# EAGLE board cpOD_array (EAGLE 7.7.0)
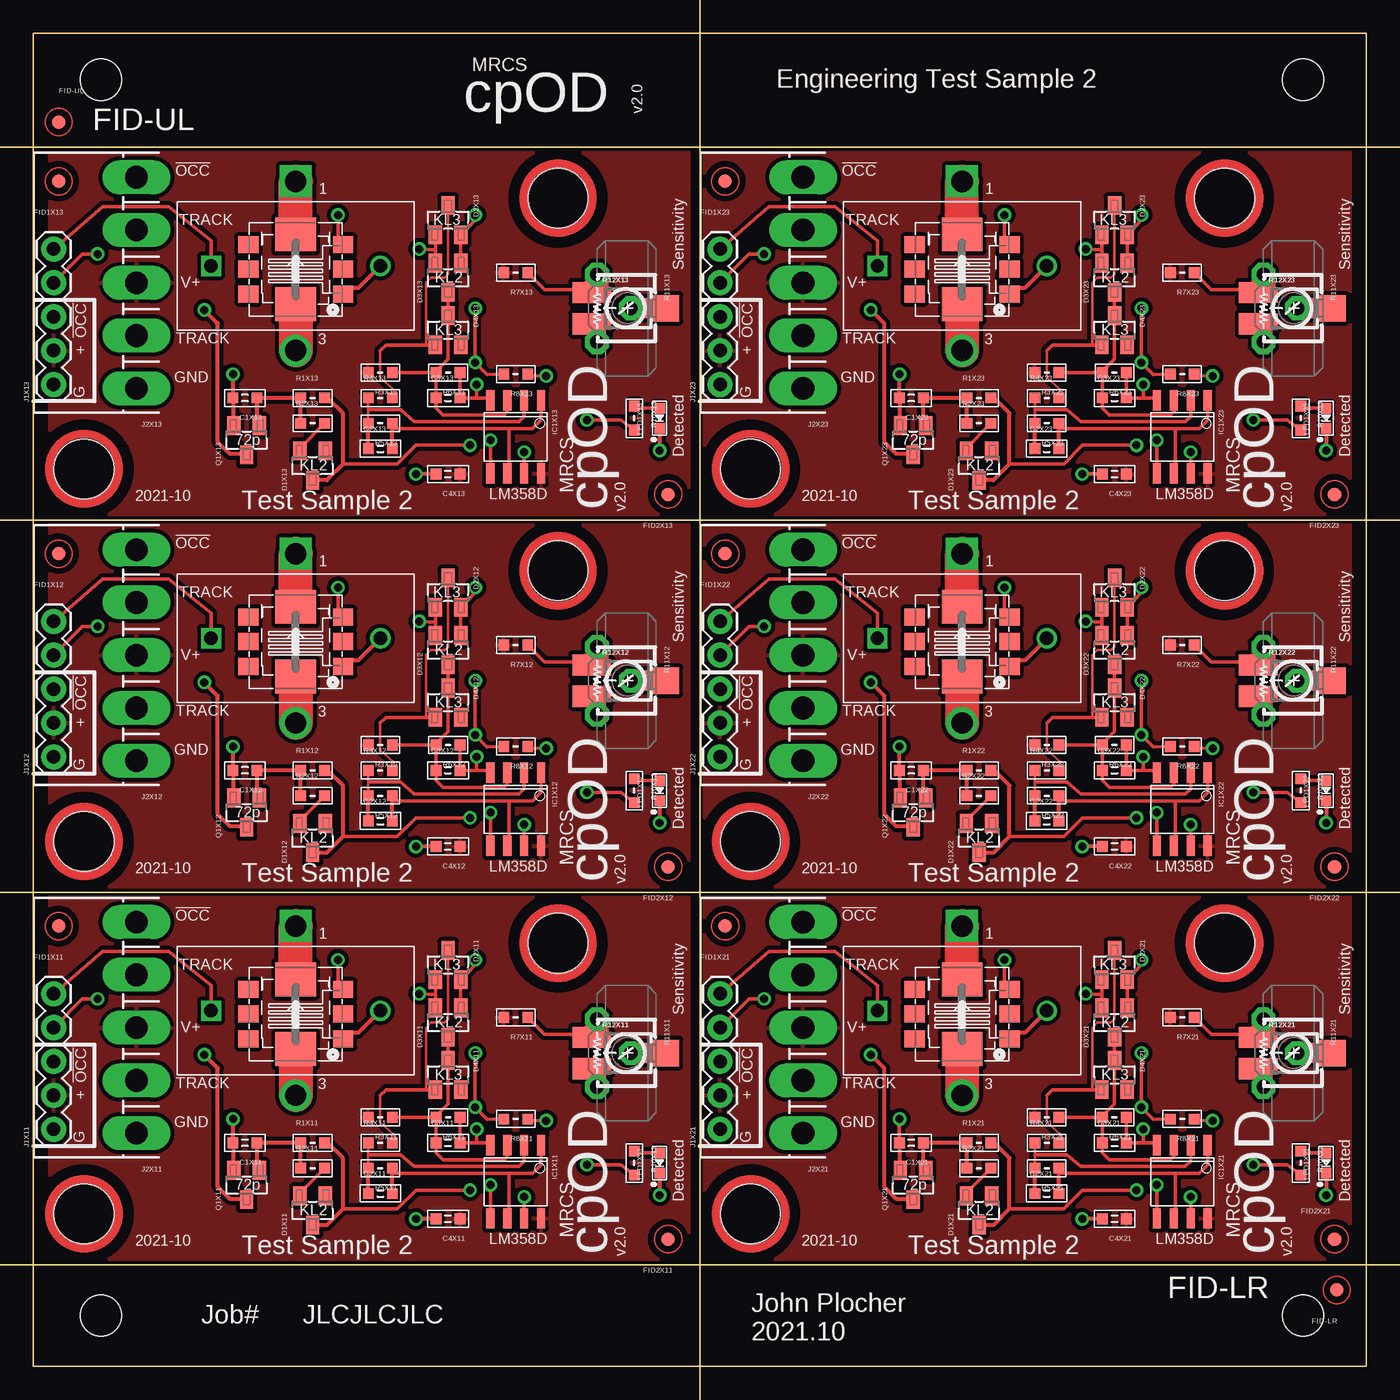
[diagram p0: board, top side]
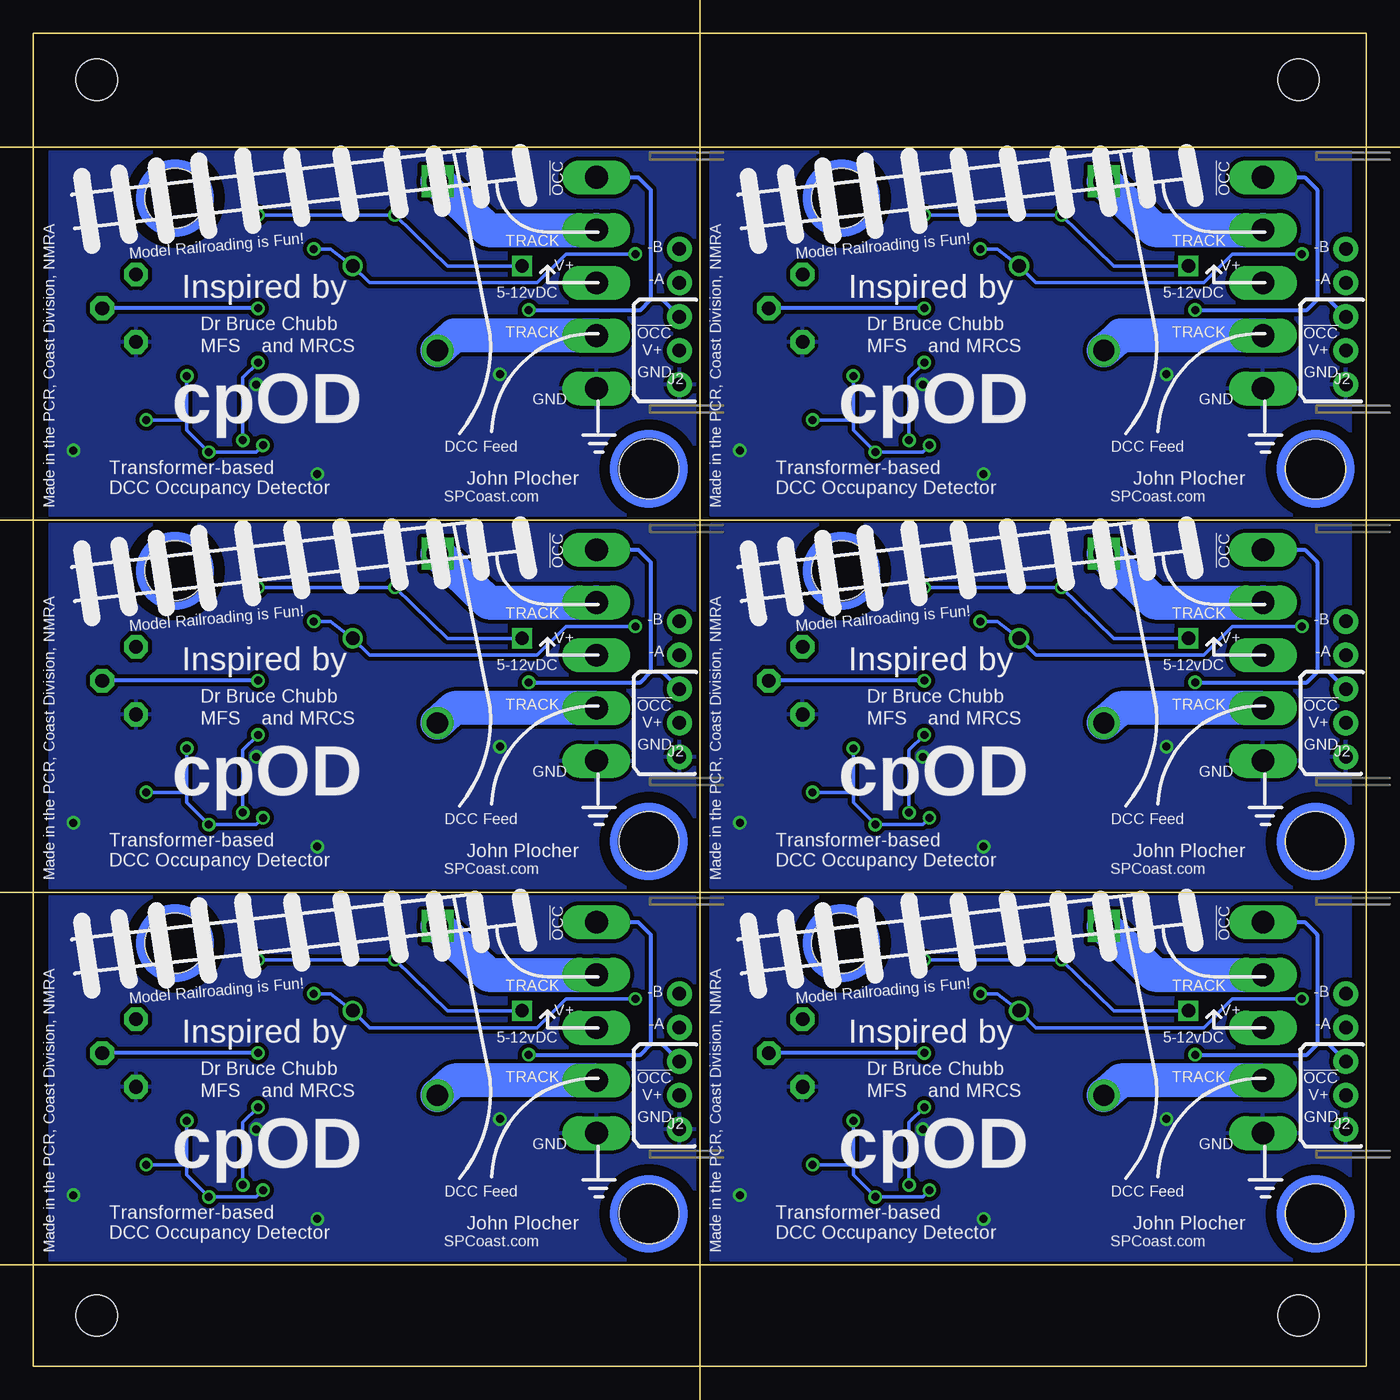
[diagram p1: board, bottom side, seen from below]

Size 100 x 100 mm. Coordinates in mm from the lower left corner, seen from the top.
Copper layers (1*16): Top 0.035mm / dielectric 1.5mm / Bottom 0.035mm
Design rules "default": minimum track width 10mil, minimum drill 0.6mm, track to track 8mil, track to pad 8mil, pad to pad 8mil, via to via 8mil, smd to smd 8mil, copper to edge 40mil, drill to drill 8mil, minimum pad ring 10mil, minimum via ring 8mil, stop-mask expansion 4mil, vias tented up to drill 0mil, thermal gap 10mil

## Footprints (pad centres in the part's own frame; a part is rotated, then mirrored left to right if it is on the bottom)
0603-CAP = smd 0.813 x 0.813: 1 -0.9,0; 2 0.9,0
SOT23 = smd 1.4 x 1: 1 1.1,-0.95; 2 1.1,0.95; 3 -1.1,0
FIDUCIAL_1MM = smd 1 x 1: 1 0,0
SO-8 = smd 1.524 x 0.61: 1 -2.743,1.905; 2 -2.743,0.635; 3 -2.743,-0.635; 4 -2.743,-1.905; 5 2.743,-1.905; 6 2.743,-0.635; 7 2.743,0.635; 8 2.743,1.905
1X05 = drill 1.016 pad 1.88: 1 0,0; 2 2.54,0; 3 5.08,0; 4 7.62,0; 5 10.16,0
KK-156-5 = drill 1.7 pad 2.184 long: 1 -7.92,0; 2 -3.96,0; 3 0,0; 4 3.96,0; 5 7.92,0
0603-LED = smd 0.8 x 0.8: A 0.75,0; C -0.75,0
0603-RES = smd 0.813 x 0.813: 1 -0.9,0; 2 0.9,0
ST-4 = smd 1.6 x 2: 1 -1.175,-3; 2 1.175,-3 | smd 2 x 2: 3 0,3
PT-10S = drill 1.016 pad 1.778 octagon: 1 -2.54,-1.27; 2 0,1.27; 3 2.54,-1.27
TC33X = smd 1.2 x 1.2: 1 -1,-1.825; 2 1,-1.825 | smd 1.5 x 1.6: 3 0,1.5
MOUNTINGHOLE-L = hole 4.5: 0,0
TH-T4B = drill 1.6 square: P1 0,6.35 | drill 1.6: P2 0,-6.35 | drill 1 square: S1 -6.35,0 | drill 1: S2 6.35,0
BOARD-10X10-3X2-PANEL = hole 3.1: 5.08,96.52; 95.25,96.52; 5.08,3.81; 95.25,3.81
M5300 = smd 1.27 x 1.52: 1 -1.85,-3.555; 2 0,-3.555; 3 1.85,-3.555; 4 1.85,3.555; 5 0,3.555; 6 -1.85,3.555 | smd 2.54 x 3.05: 7 2.615,0; 8 -2.615,0

## Placement (x,y rotation side)
C1X11  1.0uF  [0603-CAP]  15.88,16.76 180 top
C1X12  1.0uF  [0603-CAP]  15.88,44.7 180 top
C1X13  1.0uF  [0603-CAP]  15.88,72.64 180 top
C1X21  1.0uF  [0603-CAP]  65.88,16.76 180 top
C1X22  1.0uF  [0603-CAP]  65.88,44.7 180 top
C1X23  1.0uF  [0603-CAP]  65.88,72.64 180 top
C2X11  0.01uF  [0603-CAP]  26.04,12.95 0 top
C2X12  0.01uF  [0603-CAP]  26.04,40.89 0 top
C2X13  0.01uF  [0603-CAP]  26.04,68.83 0 top
C2X21  0.01uF  [0603-CAP]  76.03,12.95 0 top
C2X22  0.01uF  [0603-CAP]  76.03,40.89 0 top
C2X23  0.01uF  [0603-CAP]  76.03,68.83 0 top
C3X11  0.1uF  [0603-CAP]  31.11,16.76 0 top
C3X12  0.1uF  [0603-CAP]  31.11,44.7 0 top
C3X13  0.1uF  [0603-CAP]  31.11,72.64 0 top
C3X21  0.1uF  [0603-CAP]  81.11,16.76 0 top
C3X22  0.1uF  [0603-CAP]  81.11,44.7 0 top
C3X23  0.1uF  [0603-CAP]  81.11,72.64 0 top
C4X11  0.1uF  [0603-CAP]  31.11,11.05 180 top
C4X12  0.1uF  [0603-CAP]  31.11,38.99 180 top
C4X13  0.1uF  [0603-CAP]  31.11,66.93 180 top
C4X21  0.1uF  [0603-CAP]  81.11,11.05 180 top
C4X22  0.1uF  [0603-CAP]  81.11,38.99 180 top
C4X23  0.1uF  [0603-CAP]  81.11,66.93 180 top
D1X11  BAT54A  [SOT23]  20.95,11.68 90 top
D1X12  BAT54A  [SOT23]  20.95,39.62 90 top
D1X13  BAT54A  [SOT23]  20.95,67.56 90 top
D1X21  BAT54A  [SOT23]  70.95,11.68 90 top
D1X22  BAT54A  [SOT23]  70.95,39.62 90 top
D1X23  BAT54A  [SOT23]  70.95,67.56 90 top
D2X11  BAT54C  [SOT23]  31.11,30.1 270 top
D2X12  BAT54C  [SOT23]  31.11,58.04 270 top
D2X13  BAT54C  [SOT23]  31.11,85.98 270 top
D2X21  BAT54C  [SOT23]  81.11,30.1 270 top
D2X22  BAT54C  [SOT23]  81.11,58.04 270 top
D2X23  BAT54C  [SOT23]  81.11,85.98 270 top
D3X11  BAT54A  [SOT23]  31.11,25.78 90 top
D3X12  BAT54A  [SOT23]  31.11,53.72 90 top
D3X13  BAT54A  [SOT23]  31.11,81.66 90 top
D3X21  BAT54A  [SOT23]  81.11,25.78 90 top
D3X22  BAT54A  [SOT23]  81.11,53.72 90 top
D3X23  BAT54A  [SOT23]  81.11,81.66 90 top
D4X11  BAT54C  [SOT23]  31.11,21.84 270 top
D4X12  BAT54C  [SOT23]  31.11,49.78 270 top
D4X13  BAT54C  [SOT23]  31.11,77.72 270 top
D4X21  BAT54C  [SOT23]  81.11,21.84 270 top
D4X22  BAT54C  [SOT23]  81.11,49.78 270 top
D4X23  BAT54C  [SOT23]  81.11,77.72 270 top
FID1X11  FIDUCIAL  [FIDUCIAL_1MM]  1.91,33.02 0 top
FID1X12  FIDUCIAL  [FIDUCIAL_1MM]  1.91,60.96 0 top
FID1X13  FIDUCIAL  [FIDUCIAL_1MM]  1.91,88.9 0 top
FID1X21  FIDUCIAL  [FIDUCIAL_1MM]  51.91,33.02 0 top
FID1X22  FIDUCIAL  [FIDUCIAL_1MM]  51.91,60.96 0 top
FID1X23  FIDUCIAL  [FIDUCIAL_1MM]  51.91,88.9 0 top
FID2X11  FIDUCIAL  [FIDUCIAL_1MM]  47.62,9.53 0 top
FID2X12  FIDUCIAL  [FIDUCIAL_1MM]  47.62,37.47 0 top
FID2X13  FIDUCIAL  [FIDUCIAL_1MM]  47.62,65.41 0 top
FID2X21  FIDUCIAL  [FIDUCIAL_1MM]  97.62,9.53 0 top
FID2X22  FIDUCIAL  [FIDUCIAL_1MM]  97.62,37.47 0 top
FID2X23  FIDUCIAL  [FIDUCIAL_1MM]  97.62,65.41 0 top
FID-LR  [FIDUCIAL_1MM]  97.79,5.71 0 top
FID-UL  [FIDUCIAL_1MM]  1.91,93.34 180 top
IC1X11  LM358D  [SO-8]  36.2,13.84 270 top
IC1X12  LM358D  [SO-8]  36.2,41.78 270 top
IC1X13  LM358D  [SO-8]  36.2,69.72 270 top
IC1X21  LM358D  [SO-8]  86.19,13.84 270 top
IC1X22  LM358D  [SO-8]  86.19,41.78 270 top
IC1X23  LM358D  [SO-8]  86.19,69.72 270 top
J1X11  [1X05]  1.52,17.78 90 top
J1X12  [1X05]  1.52,45.72 90 top
J1X13  [1X05]  1.52,73.66 90 top
J1X21  [1X05]  51.52,17.78 90 top
J1X22  [1X05]  51.52,45.72 90 top
J1X23  [1X05]  51.52,73.66 90 top
J2X11  [KK-156-5]  7.75,25.4 90 top
J2X12  [KK-156-5]  7.75,53.34 90 top
J2X13  [KK-156-5]  7.75,81.28 90 top
J2X21  [KK-156-5]  57.75,25.4 90 top
J2X22  [KK-156-5]  57.75,53.34 90 top
J2X23  [KK-156-5]  57.75,81.28 90 top
LED1X11  Y  [0603-LED]  46.99,15.24 90 top
LED1X12  Y  [0603-LED]  46.99,43.18 90 top
LED1X13  Y  [0603-LED]  46.99,71.12 90 top
LED1X21  Y  [0603-LED]  96.99,15.24 90 top
LED1X22  Y  [0603-LED]  96.99,43.18 90 top
LED1X23  Y  [0603-LED]  96.99,71.12 90 top
Q1X11  2N7002  [SOT23]  16,13.59 90 top
Q1X12  2N7002  [SOT23]  16,41.53 90 top
Q1X13  2N7002  [SOT23]  16,69.47 90 top
Q1X21  2N7002  [SOT23]  66,13.59 90 top
Q1X22  2N7002  [SOT23]  66,41.53 90 top
Q1X23  2N7002  [SOT23]  66,69.47 90 top
R1X11  2M2  [0603-RES]  20.95,16.76 0 top
R1X12  2M2  [0603-RES]  20.95,44.7 0 top
R1X13  2M2  [0603-RES]  20.95,72.64 0 top
R1X21  2M2  [0603-RES]  70.95,16.76 0 top
R1X22  2M2  [0603-RES]  70.95,44.7 0 top
R1X23  2M2  [0603-RES]  70.95,72.64 0 top
R2X11  10K  [0603-RES]  20.95,14.86 0 top
R2X12  10K  [0603-RES]  20.95,42.8 0 top
R2X13  10K  [0603-RES]  20.95,70.74 0 top
R2X21  10K  [0603-RES]  70.95,14.86 0 top
R2X22  10K  [0603-RES]  70.95,42.8 0 top
R2X23  10K  [0603-RES]  70.95,70.74 0 top
R3X11  10K  [0603-RES]  26.04,18.67 180 top
R3X12  10K  [0603-RES]  26.04,46.61 180 top
R3X13  10K  [0603-RES]  26.04,74.55 180 top
R3X21  10K  [0603-RES]  76.03,18.67 180 top
R3X22  10K  [0603-RES]  76.03,46.61 180 top
R3X23  10K  [0603-RES]  76.03,74.55 180 top
R4X11  200R  [0603-RES]  26.04,16.76 0 top
R4X12  200R  [0603-RES]  26.04,44.7 0 top
R4X13  200R  [0603-RES]  26.04,72.64 0 top
R4X21  200R  [0603-RES]  76.03,16.76 0 top
R4X22  200R  [0603-RES]  76.03,44.7 0 top
R4X23  200R  [0603-RES]  76.03,72.64 0 top
R5X11  1M  [0603-RES]  26.04,14.86 180 top
R5X12  1M  [0603-RES]  26.04,42.8 180 top
R5X13  1M  [0603-RES]  26.04,70.74 180 top
R5X21  1M  [0603-RES]  76.03,14.86 180 top
R5X22  1M  [0603-RES]  76.03,42.8 180 top
R5X23  1M  [0603-RES]  76.03,70.74 180 top
R6X11  10K  [0603-RES]  31.11,18.67 180 top
R6X12  10K  [0603-RES]  31.11,46.61 180 top
R6X13  10K  [0603-RES]  31.11,74.55 180 top
R6X21  10K  [0603-RES]  81.11,18.67 180 top
R6X22  10K  [0603-RES]  81.11,46.61 180 top
R6X23  10K  [0603-RES]  81.11,74.55 180 top
R7X11  10K  [0603-RES]  36.2,26.16 180 top
R7X12  10K  [0603-RES]  36.2,54.1 180 top
R7X13  10K  [0603-RES]  36.2,82.04 180 top
R7X21  10K  [0603-RES]  86.19,26.16 180 top
R7X22  10K  [0603-RES]  86.19,54.1 180 top
R7X23  10K  [0603-RES]  86.19,82.04 180 top
R8X11  1M  [0603-RES]  36.2,18.54 180 top
R8X12  1M  [0603-RES]  36.2,46.48 180 top
R8X13  1M  [0603-RES]  36.2,74.42 180 top
R8X21  1M  [0603-RES]  86.19,18.54 180 top
R8X22  1M  [0603-RES]  86.19,46.48 180 top
R8X23  1M  [0603-RES]  86.19,74.42 180 top
R9X11  10K  [ST-4]  44.45,23.5 270 top
R9X12  10K  [ST-4]  44.45,51.44 270 top
R9X13  10K  [ST-4]  44.45,79.38 270 top
R9X21  10K  [ST-4]  94.45,23.5 270 top
R9X22  10K  [ST-4]  94.45,51.44 270 top
R9X23  10K  [ST-4]  94.45,79.38 270 top
R10X11  2k2  [0603-RES]  45.09,15.24 270 top
R10X12  2k2  [0603-RES]  45.09,43.18 270 top
R10X13  2k2  [0603-RES]  45.09,71.12 270 top
R10X21  2k2  [0603-RES]  95.08,15.24 270 top
R10X22  2k2  [0603-RES]  95.08,43.18 270 top
R10X23  2k2  [0603-RES]  95.08,71.12 270 top
R11X11  10K  [PT-10S]  43.56,23.5 270 top
R11X12  10K  [PT-10S]  43.56,51.44 270 top
R11X13  10K  [PT-10S]  43.56,79.38 270 top
R11X21  10K  [PT-10S]  93.56,23.5 270 top
R11X22  10K  [PT-10S]  93.56,51.44 270 top
R11X23  10K  [PT-10S]  93.56,79.38 270 top
R12X11  10K  [TC33X]  44.58,23.5 270 top
R12X12  10K  [TC33X]  44.58,51.44 270 top
R12X13  10K  [TC33X]  44.58,79.38 270 top
R12X21  10K  [TC33X]  94.58,23.5 270 top
R12X22  10K  [TC33X]  94.58,51.44 270 top
R12X23  10K  [TC33X]  94.58,79.38 270 top
U$1X11  MOUNTINGHOLEL  [MOUNTINGHOLE-L]  3.81,11.43 0 top
U$1X12  MOUNTINGHOLEL  [MOUNTINGHOLE-L]  3.81,39.37 0 top
U$1X13  MOUNTINGHOLEL  [MOUNTINGHOLE-L]  3.81,67.31 0 top
U$1X21  MOUNTINGHOLEL  [MOUNTINGHOLE-L]  53.81,11.43 0 top
U$1X22  MOUNTINGHOLEL  [MOUNTINGHOLE-L]  53.81,39.37 0 top
U$1X23  MOUNTINGHOLEL  [MOUNTINGHOLE-L]  53.81,67.31 0 top
U$2X11  MOUNTINGHOLEL  [MOUNTINGHOLE-L]  39.37,31.75 0 top
U$2X12  MOUNTINGHOLEL  [MOUNTINGHOLE-L]  39.37,59.69 0 top
U$2X13  MOUNTINGHOLEL  [MOUNTINGHOLE-L]  39.37,87.63 0 top
U$2X21  MOUNTINGHOLEL  [MOUNTINGHOLE-L]  89.37,31.75 0 top
U$2X22  MOUNTINGHOLEL  [MOUNTINGHOLE-L]  89.37,59.69 0 top
U$2X23  MOUNTINGHOLEL  [MOUNTINGHOLE-L]  89.37,87.63 0 top
X1X11  [TH-T4B]  19.68,26.67 0 top
X1X12  [TH-T4B]  19.68,54.61 0 top
X1X13  [TH-T4B]  19.68,82.55 0 top
X1X21  [TH-T4B]  69.69,26.67 0 top
X1X22  [TH-T4B]  69.69,54.61 0 top
X1X23  [TH-T4B]  69.69,82.55 0 top
X2X1  [BOARD-10X10-3X2-PANEL]  0,0 0 top
X2X11  [M5300]  19.68,26.42 90 top
X2X12  [M5300]  19.68,54.36 90 top
X2X13  [M5300]  19.68,82.3 90 top
X2X21  [M5300]  69.69,26.42 90 top
X2X22  [M5300]  69.69,54.36 90 top
X2X23  [M5300]  69.69,82.3 90 top

## Library data of the parts
C1X11-C1X13 C1X21-C1X23 C2X11-C2X13 C2X21-C2X23 C3X11-C3X13 C3X21-C3X23 C4X11-C4X13 C4X21-C4X23 D1X11-D1X13 D1X21-D1X23 D2X11-D2X13 D2X21-D2X23 D3X11-D3X13 D3X21-D3X23 D4X11-D4X13 D4X21-D4X23 FID1X11-FID1X13 FID1X21-FID1X23 FID2X11-FID2X13 FID2X21-FID2X23 FID-LR FID-UL IC1X11-IC1X13 IC1X21-IC1X23 J1X11-J1X13 J1X21-J1X23 J2X11-J2X13 J2X21-J2X23 LED1X11-LED1X13 LED1X21-LED1X23 Q1X11-Q1X13 Q1X21-Q1X23 R1X11-R1X13 R1X21-R1X23 R2X11-R2X13 R2X21-R2X23 R3X11-R3X13 R3X21-R3X23 R4X11-R4X13 R4X21-R4X23 R5X11-R5X13 R5X21-R5X23 R6X11-R6X13 R6X21-R6X23 R7X11-R7X13 R7X21-R7X23 R8X11-R8X13 R8X21-R8X23 R9X11-R9X13 R9X21-R9X23 R10X11-R10X13 R10X21-R10X23 R11X11-R11X13 R11X21-R11X23 R12X11-R12X13 R12X21-R12X23 U$1X11-U$1X13 U$1X21-U$1X23 U$2X11-U$2X13 U$2X21-U$2X23 X1X11-X1X13 X1X21-X1X23 X2X1 X2X11-X2X13 X2X21-X2X23 = SPCoast

## Nets
!VOUTX11: J1X11.3 J2X11.5 Q1X11.3
!VOUTX12: J1X12.3 J2X12.5 Q1X12.3
!VOUTX13: J1X13.3 J2X13.5 Q1X13.3
!VOUTX21: J1X21.3 J2X21.5 Q1X21.3
!VOUTX22: J1X22.3 J2X22.5 Q1X22.3
!VOUTX23: J1X23.3 J2X23.5 Q1X23.3
DCC-AX11: J2X11.2 X1X11.P2 X2X11.8
DCC-AX12: J2X12.2 X1X12.P2 X2X12.8
DCC-AX13: J2X13.2 X1X13.P2 X2X13.8
DCC-AX21: J2X21.2 X1X21.P2 X2X21.8
DCC-AX22: J2X22.2 X1X22.P2 X2X22.8
DCC-AX23: J2X23.2 X1X23.P2 X2X23.8
DCC-BX11: J2X11.4 X1X11.P1 X2X11.7
DCC-BX12: J2X12.4 X1X12.P1 X2X12.7
DCC-BX13: J2X13.4 X1X13.P1 X2X13.7
DCC-BX21: J2X21.4 X1X21.P1 X2X21.7
DCC-BX22: J2X22.4 X1X22.P1 X2X22.7
DCC-BX23: J2X23.4 X1X23.P1 X2X23.7
DETECTEDX11: D1X11.3 IC1X11.7 R1X11.2 R8X11.1 R10X11.2
DETECTEDX12: D1X12.3 IC1X12.7 R1X12.2 R8X12.1 R10X12.2
DETECTEDX13: D1X13.3 IC1X13.7 R1X13.2 R8X13.1 R10X13.2
DETECTEDX21: D1X21.3 IC1X21.7 R1X21.2 R8X21.1 R10X21.2
DETECTEDX22: D1X22.3 IC1X22.7 R1X22.2 R8X22.1 R10X22.2
DETECTEDX23: D1X23.3 IC1X23.7 R1X23.2 R8X23.1 R10X23.2
FAST-RISEX11: D1X11.2 R2X11.2
FAST-RISEX12: D1X12.2 R2X12.2
FAST-RISEX13: D1X13.2 R2X13.2
FAST-RISEX21: D1X21.2 R2X21.2
FAST-RISEX22: D1X22.2 R2X22.2
FAST-RISEX23: D1X23.2 R2X23.2
GNDX11: C1X11.2 C3X11.2 C4X11.2 IC1X11.4 J1X11.1 J2X11.1 LED1X11.C Q1X11.2 R6X11.1 R9X11.2 R11X11.3 R12X11.2
GNDX12: C1X12.2 C3X12.2 C4X12.2 IC1X12.4 J1X12.1 J2X12.1 LED1X12.C Q1X12.2 R6X12.1 R9X12.2 R11X12.3 R12X12.2
GNDX13: C1X13.2 C3X13.2 C4X13.2 IC1X13.4 J1X13.1 J2X13.1 LED1X13.C Q1X13.2 R6X13.1 R9X13.2 R11X13.3 R12X13.2
GNDX21: C1X21.2 C3X21.2 C4X21.2 IC1X21.4 J1X21.1 J2X21.1 LED1X21.C Q1X21.2 R6X21.1 R9X21.2 R11X21.3 R12X21.2
GNDX22: C1X22.2 C3X22.2 C4X22.2 IC1X22.4 J1X22.1 J2X22.1 LED1X22.C Q1X22.2 R6X22.1 R9X22.2 R11X22.3 R12X22.2
GNDX23: C1X23.2 C3X23.2 C4X23.2 IC1X23.4 J1X23.1 J2X23.1 LED1X23.C Q1X23.2 R6X23.1 R9X23.2 R11X23.3 R12X23.2
INPUT-AX11: D2X11.1 D3X11.2 J1X11.4 X1X11.S2 X2X11.1
INPUT-AX12: D2X12.1 D3X12.2 J1X12.4 X1X12.S2 X2X12.1
INPUT-AX13: D2X13.1 D3X13.2 J1X13.4 X1X13.S2 X2X13.1
INPUT-AX21: D2X21.1 D3X21.2 J1X21.4 X1X21.S2 X2X21.1
INPUT-AX22: D2X22.1 D3X22.2 J1X22.4 X1X22.S2 X2X22.1
INPUT-AX23: D2X23.1 D3X23.2 J1X23.4 X1X23.S2 X2X23.1
INPUT-BX11: D2X11.2 D3X11.1 J1X11.5 X1X11.S1 X2X11.3
INPUT-BX12: D2X12.2 D3X12.1 J1X12.5 X1X12.S1 X2X12.3
INPUT-BX13: D2X13.2 D3X13.1 J1X13.5 X1X13.S1 X2X13.3
INPUT-BX21: D2X21.2 D3X21.1 J1X21.5 X1X21.S1 X2X21.3
INPUT-BX22: D2X22.2 D3X22.1 J1X22.5 X1X22.S1 X2X22.3
INPUT-BX23: D2X23.2 D3X23.1 J1X23.5 X1X23.S1 X2X23.3
INPUT-NEGATIVEX11: D2X11.3 D4X11.1 R4X11.2
INPUT-NEGATIVEX12: D2X12.3 D4X12.1 R4X12.2
INPUT-NEGATIVEX13: D2X13.3 D4X13.1 R4X13.2
INPUT-NEGATIVEX21: D2X21.3 D4X21.1 R4X21.2
INPUT-NEGATIVEX22: D2X22.3 D4X22.1 R4X22.2
INPUT-NEGATIVEX23: D2X23.3 D4X23.1 R4X23.2
N$11X11: LED1X11.A R10X11.1
N$11X12: LED1X12.A R10X12.1
N$11X13: LED1X13.A R10X13.1
N$11X21: LED1X21.A R10X21.1
N$11X22: LED1X22.A R10X22.1
N$11X23: LED1X23.A R10X23.1
OCCUPIEDX11: C1X11.1 Q1X11.1 R1X11.1 R2X11.1
OCCUPIEDX12: C1X12.1 Q1X12.1 R1X12.1 R2X12.1
OCCUPIEDX13: C1X13.1 Q1X13.1 R1X13.1 R2X13.1
OCCUPIEDX21: C1X21.1 Q1X21.1 R1X21.1 R2X21.1
OCCUPIEDX22: C1X22.1 Q1X22.1 R1X22.1 R2X22.1
OCCUPIEDX23: C1X23.1 Q1X23.1 R1X23.1 R2X23.1
SENS+X11: R7X11.1 R9X11.1 R11X11.1 R12X11.1
SENS+X12: R7X12.1 R9X12.1 R11X12.1 R12X12.1
SENS+X13: R7X13.1 R9X13.1 R11X13.1 R12X13.1
SENS+X21: R7X21.1 R9X21.1 R11X21.1 R12X21.1
SENS+X22: R7X22.1 R9X22.1 R11X22.1 R12X22.1
SENS+X23: R7X23.1 R9X23.1 R11X23.1 R12X23.1
SENSITIVITYX11: IC1X11.5 R8X11.2 R9X11.3 R11X11.2 R12X11.3
SENSITIVITYX12: IC1X12.5 R8X12.2 R9X12.3 R11X12.2 R12X12.3
SENSITIVITYX13: IC1X13.5 R8X13.2 R9X13.3 R11X13.2 R12X13.3
SENSITIVITYX21: IC1X21.5 R8X21.2 R9X21.3 R11X21.2 R12X21.3
SENSITIVITYX22: IC1X22.5 R8X22.2 R9X22.3 R11X22.2 R12X22.3
SENSITIVITYX23: IC1X23.5 R8X23.2 R9X23.3 R11X23.2 R12X23.3
STAGE1+X11: C3X11.1 D3X11.3 D4X11.3 IC1X11.3 R3X11.1 R6X11.2
STAGE1+X12: C3X12.1 D3X12.3 D4X12.3 IC1X12.3 R3X12.1 R6X12.2
STAGE1+X13: C3X13.1 D3X13.3 D4X13.3 IC1X13.3 R3X13.1 R6X13.2
STAGE1+X21: C3X21.1 D3X21.3 D4X21.3 IC1X21.3 R3X21.1 R6X21.2
STAGE1+X22: C3X22.1 D3X22.3 D4X22.3 IC1X22.3 R3X22.1 R6X22.2
STAGE1+X23: C3X23.1 D3X23.3 D4X23.3 IC1X23.3 R3X23.1 R6X23.2
STAGE1-X11: C2X11.1 IC1X11.2 R4X11.1 R5X11.2
STAGE1-X12: C2X12.1 IC1X12.2 R4X12.1 R5X12.2
STAGE1-X13: C2X13.1 IC1X13.2 R4X13.1 R5X13.2
STAGE1-X21: C2X21.1 IC1X21.2 R4X21.1 R5X21.2
STAGE1-X22: C2X22.1 IC1X22.2 R4X22.1 R5X22.2
STAGE1-X23: C2X23.1 IC1X23.2 R4X23.1 R5X23.2
TRIGGEREDX11: C2X11.2 IC1X11.1 IC1X11.6 R5X11.1
TRIGGEREDX12: C2X12.2 IC1X12.1 IC1X12.6 R5X12.1
TRIGGEREDX13: C2X13.2 IC1X13.1 IC1X13.6 R5X13.1
TRIGGEREDX21: C2X21.2 IC1X21.1 IC1X21.6 R5X21.1
TRIGGEREDX22: C2X22.2 IC1X22.1 IC1X22.6 R5X22.1
TRIGGEREDX23: C2X23.2 IC1X23.1 IC1X23.6 R5X23.1
V+X11: C4X11.1 IC1X11.8 J1X11.2 J2X11.3 R3X11.2 R7X11.2
V+X12: C4X12.1 IC1X12.8 J1X12.2 J2X12.3 R3X12.2 R7X12.2
V+X13: C4X13.1 IC1X13.8 J1X13.2 J2X13.3 R3X13.2 R7X13.2
V+X21: C4X21.1 IC1X21.8 J1X21.2 J2X21.3 R3X21.2 R7X21.2
V+X22: C4X22.1 IC1X22.8 J1X22.2 J2X22.3 R3X22.2 R7X22.2
V+X23: C4X23.1 IC1X23.8 J1X23.2 J2X23.3 R3X23.2 R7X23.2

## Tracks (layer width: path | path; a pad name or v marks a point on that pad's centre or on a via)
!VOUTX11  (via drill 0.6 pad 0.9)
  Top 0.305: v12.83,23.37 13.84,22.35 13.84,13.46 14.73,12.57 15.92,12.57 Q1X11.3 15.96,12.45
  Bottom 0.305: J1X11.3 2.79,24.13 3.68,24.13 | J2X11.5 4.62,33.32 3.68,32.38 3.68,24.13 | v12.83,23.37 4.45,23.37 3.68,24.13
!VOUTX12  (via drill 0.6 pad 0.9)
  Top 0.305: v12.83,51.31 13.84,50.29 13.84,41.4 14.73,40.51 15.92,40.51 Q1X12.3 15.96,40.39
  Bottom 0.305: J1X12.3 2.79,52.07 3.68,52.07 | J2X12.5 4.62,61.26 3.68,60.33 3.68,52.07 | v12.83,51.31 4.45,51.31 3.68,52.07
!VOUTX13  (via drill 0.6 pad 0.9)
  Top 0.305: v12.83,79.25 13.84,78.23 13.84,69.34 14.73,68.45 15.92,68.45 Q1X13.3 15.96,68.33
  Bottom 0.305: J1X13.3 2.79,80.01 3.68,80.01 | J2X13.5 4.62,89.2 3.68,88.27 3.68,80.01 | v12.83,79.25 4.45,79.25 3.68,80.01
!VOUTX21  (via drill 0.6 pad 0.9)
  Top 0.305: v62.83,23.37 63.84,22.35 63.84,13.46 64.73,12.57 65.92,12.57 Q1X21.3 65.96,12.45
  Bottom 0.305: J1X21.3 52.79,24.13 53.68,24.13 | J2X21.5 54.62,33.32 53.68,32.38 53.68,24.13 | v62.83,23.37 54.45,23.37 53.68,24.13
!VOUTX22  (via drill 0.6 pad 0.9)
  Top 0.305: v62.83,51.31 63.84,50.29 63.84,41.4 64.73,40.51 65.92,40.51 Q1X22.3 65.96,40.39
  Bottom 0.305: J1X22.3 52.79,52.07 53.68,52.07 | J2X22.5 54.62,61.26 53.68,60.33 53.68,52.07 | v62.83,51.31 54.45,51.31 53.68,52.07
!VOUTX23  (via drill 0.6 pad 0.9)
  Top 0.305: v62.83,79.25 63.84,78.23 63.84,69.34 64.73,68.45 65.92,68.45 Q1X23.3 65.96,68.33
  Bottom 0.305: J1X23.3 52.79,80.01 53.68,80.01 | J2X23.5 54.62,89.2 53.68,88.27 53.68,80.01 | v62.83,79.25 54.45,79.25 53.68,80.01
DCC-AX11
  Top 2.54: X2X11.8 X1X11.P2
  Bottom 2.54: J2X11.2 18.41,21.44 X1X11.P2
DCC-AX12
  Top 2.54: X2X12.8 X1X12.P2
  Bottom 2.54: J2X12.2 18.41,49.38 X1X12.P2
DCC-AX13
  Top 2.54: X2X13.8 X1X13.P2
  Bottom 2.54: J2X13.2 18.41,77.32 X1X13.P2
DCC-AX21
  Top 2.54: X2X21.8 X1X21.P2
  Bottom 2.54: J2X21.2 68.42,21.44 X1X21.P2
DCC-AX22
  Top 2.54: X2X22.8 X1X22.P2
  Bottom 2.54: J2X22.2 68.42,49.38 X1X22.P2
DCC-AX23
  Top 2.54: X2X23.8 X1X23.P2
  Bottom 2.54: J2X23.2 68.42,77.32 X1X23.P2
DCC-BX11
  Top 2.54: X2X11.7 X1X11.P1
  Bottom 2.54: X1X11.P1 15.88,29.36 J2X11.4
DCC-BX12
  Top 2.54: X2X12.7 X1X12.P1
  Bottom 2.54: X1X12.P1 15.88,57.3 J2X12.4
DCC-BX13
  Top 2.54: X2X13.7 X1X13.P1
  Bottom 2.54: X1X13.P1 15.88,85.24 J2X13.4
DCC-BX21
  Top 2.54: X2X21.7 X1X21.P1
  Bottom 2.54: X1X21.P1 65.88,29.36 J2X21.4
DCC-BX22
  Top 2.54: X2X22.7 X1X22.P1
  Bottom 2.54: X1X22.P1 65.88,57.3 J2X22.4
DCC-BX23
  Top 2.54: X2X23.7 X1X23.P1
  Bottom 2.54: X1X23.P1 65.88,85.24 J2X23.4
DETECTEDX11  (via drill 0.6 pad 0.9)
  Top 0.254: IC1X11.7 v36.83,12.7 | v32.77,13.21 28.7,13.21 27.3,11.81 23.24,11.81 | v38.48,18.41 37.09,18.43 R8X11.1 | R10X11.2 44.08,15.11 v41.53,15.11
  Top 0.305: 21,10.41 D1X11.3 22.01,10.58 23.24,11.81 23.24,15.62 22.1,16.76 R1X11.2
  Bottom 0.254: v32.77,13.21 33.27,12.7 v36.83,12.7 38.48,14.35 38.48,15.11 | v38.48,18.41 38.48,15.11 | v41.53,15.11 38.48,15.11
DETECTEDX12  (via drill 0.6 pad 0.9)
  Top 0.254: IC1X12.7 v36.83,40.64 | v32.77,41.15 28.7,41.15 27.3,39.75 23.24,39.75 | v38.48,46.35 37.09,46.37 R8X12.1 | R10X12.2 44.08,43.05 v41.53,43.05
  Top 0.305: 21,38.35 D1X12.3 22.01,38.52 23.24,39.75 23.24,43.56 22.1,44.7 R1X12.2
  Bottom 0.254: v32.77,41.15 33.27,40.64 v36.83,40.64 38.48,42.29 38.48,43.05 | v38.48,46.35 38.48,43.05 | v41.53,43.05 38.48,43.05
DETECTEDX13  (via drill 0.6 pad 0.9)
  Top 0.254: IC1X13.7 v36.83,68.58 | v32.77,69.09 28.7,69.09 27.3,67.69 23.24,67.69 | v38.48,74.3 37.09,74.31 R8X13.1 | R10X13.2 44.08,70.99 v41.53,70.99
  Top 0.305: 21,66.29 D1X13.3 22.01,66.46 23.24,67.69 23.24,71.5 22.1,72.64 R1X13.2
  Bottom 0.254: v32.77,69.09 33.27,68.58 v36.83,68.58 38.48,70.23 38.48,70.99 | v38.48,74.3 38.48,70.99 | v41.53,70.99 38.48,70.99
DETECTEDX21  (via drill 0.6 pad 0.9)
  Top 0.254: IC1X21.7 v86.83,12.7 | v82.77,13.21 78.7,13.21 77.31,11.81 73.24,11.81 | v88.48,18.41 87.09,18.43 R8X21.1 | R10X21.2 94.08,15.11 v91.53,15.11
  Top 0.305: 71,10.41 D1X21.3 72.01,10.58 73.24,11.81 73.24,15.62 72.1,16.76 R1X21.2
  Bottom 0.254: v82.77,13.21 83.27,12.7 v86.83,12.7 88.48,14.35 88.48,15.11 | v88.48,18.41 88.48,15.11 | v91.53,15.11 88.48,15.11
DETECTEDX22  (via drill 0.6 pad 0.9)
  Top 0.254: IC1X22.7 v86.83,40.64 | v82.77,41.15 78.7,41.15 77.31,39.75 73.24,39.75 | v88.48,46.35 87.09,46.37 R8X22.1 | R10X22.2 94.08,43.05 v91.53,43.05
  Top 0.305: 71,38.35 D1X22.3 72.01,38.52 73.24,39.75 73.24,43.56 72.1,44.7 R1X22.2
  Bottom 0.254: v82.77,41.15 83.27,40.64 v86.83,40.64 88.48,42.29 88.48,43.05 | v88.48,46.35 88.48,43.05 | v91.53,43.05 88.48,43.05
DETECTEDX23  (via drill 0.6 pad 0.9)
  Top 0.254: IC1X23.7 v86.83,68.58 | v82.77,69.09 78.7,69.09 77.31,67.69 73.24,67.69 | v88.48,74.3 87.09,74.31 R8X23.1 | R10X23.2 94.08,70.99 v91.53,70.99
  Top 0.305: 71,66.29 D1X23.3 72.01,66.46 73.24,67.69 73.24,71.5 72.1,72.64 R1X23.2
  Bottom 0.254: v82.77,69.09 83.27,68.58 v86.83,68.58 88.48,70.23 88.48,70.99 | v88.48,74.3 88.48,70.99 | v91.53,70.99 88.48,70.99
FAST-RISEX11
  Top 0.254: D1X11.2 20,13.01 R2X11.2
FAST-RISEX12
  Top 0.254: D1X12.2 20,40.95 R2X12.2
FAST-RISEX13
  Top 0.254: D1X13.2 20,68.89 R2X13.2
FAST-RISEX21
  Top 0.254: D1X21.2 70,13.01 R2X21.2
FAST-RISEX22
  Top 0.254: D1X22.2 70,40.95 R2X22.2
FAST-RISEX23
  Top 0.254: D1X23.2 70,68.89 R2X23.2
GNDX11  (via drill 0.6 pad 0.9)
  Top 0.254: 33.27,16.76 34.11,16.76 IC1X11.4 | v33.27,17.78 33.27,16.76 | R6X11.1 C3X11.2 33.27,16.76
  Top 0.305: 14.97,14.64 Q1X11.2 14.97,14.77 C1X11.2 14.99,16.77 v14.99,18.54 | 41.53,22.24 R9X11.2 42.16,22.32 42.58,22.32 R12X11.2 | LED1X11.C v46.99,12.83 | C4X11.2 v28.7,11.05
  Top 0.813: 42.16,22.32 42.16,21.97 R11X11.3 42.8,22.61
  pour Bottom (isolate 0.305): 0.38,35.18 49.15,35.18 49.15,8 0.38,8
GNDX12  (via drill 0.6 pad 0.9)
  Top 0.254: 33.27,44.7 34.11,44.7 IC1X12.4 | v33.27,45.72 33.27,44.7 | R6X12.1 C3X12.2 33.27,44.7
  Top 0.305: 14.97,42.58 Q1X12.2 14.97,42.71 C1X12.2 14.99,44.72 v14.99,46.48 | 41.53,50.18 R9X12.2 42.16,50.26 42.58,50.26 R12X12.2 | LED1X12.C v46.99,40.77 | C4X12.2 v28.7,38.99
  Top 0.813: 42.16,50.26 42.16,49.91 R11X12.3 42.8,50.55
  pour Bottom (isolate 0.305): 0.38,63.12 49.15,63.12 49.15,35.94 0.38,35.94
GNDX13  (via drill 0.6 pad 0.9)
  Top 0.254: 33.27,72.64 34.11,72.64 IC1X13.4 | v33.27,73.66 33.27,72.64 | R6X13.1 C3X13.2 33.27,72.64
  Top 0.305: 14.97,70.52 Q1X13.2 14.97,70.65 C1X13.2 14.99,72.66 v14.99,74.42 | 41.53,78.12 R9X13.2 42.16,78.2 42.58,78.2 R12X13.2 | LED1X13.C v46.99,68.71 | C4X13.2 v28.7,66.93
  Top 0.813: 42.16,78.2 42.16,77.85 R11X13.3 42.8,78.49
  pour Bottom (isolate 0.305): 0.38,91.06 49.15,91.06 49.15,63.88 0.38,63.88
GNDX21  (via drill 0.6 pad 0.9)
  Top 0.254: 83.27,16.76 84.11,16.76 IC1X21.4 | v83.27,17.78 83.27,16.76 | R6X21.1 C3X21.2 83.27,16.76
  Top 0.305: 64.97,14.64 Q1X21.2 64.97,14.77 C1X21.2 64.99,16.77 v64.99,18.54 | 91.53,22.24 R9X21.2 92.16,22.32 92.58,22.32 R12X21.2 | LED1X21.C v96.99,12.83 | C4X21.2 v78.7,11.05
  Top 0.813: 92.16,22.32 92.16,21.97 R11X21.3 92.8,22.61
  pour Bottom (isolate 0.305): 50.38,35.18 99.15,35.18 99.15,8 50.38,8
GNDX22  (via drill 0.6 pad 0.9)
  Top 0.254: 83.27,44.7 84.11,44.7 IC1X22.4 | v83.27,45.72 83.27,44.7 | R6X22.1 C3X22.2 83.27,44.7
  Top 0.305: 64.97,42.58 Q1X22.2 64.97,42.71 C1X22.2 64.99,44.72 v64.99,46.48 | 91.53,50.18 R9X22.2 92.16,50.26 92.58,50.26 R12X22.2 | LED1X22.C v96.99,40.77 | C4X22.2 v78.7,38.99
  Top 0.813: 92.16,50.26 92.16,49.91 R11X22.3 92.8,50.55
  pour Bottom (isolate 0.305): 50.38,63.12 99.15,63.12 99.15,35.94 50.38,35.94
GNDX23  (via drill 0.6 pad 0.9)
  Top 0.254: 83.27,72.64 84.11,72.64 IC1X23.4 | v83.27,73.66 83.27,72.64 | R6X23.1 C3X23.2 83.27,72.64
  Top 0.305: 64.97,70.52 Q1X23.2 64.97,70.65 C1X23.2 64.99,72.66 v64.99,74.42 | 91.53,78.12 R9X23.2 92.16,78.2 92.58,78.2 R12X23.2 | LED1X23.C v96.99,68.71 | C4X23.2 v78.7,66.93
  Top 0.813: 92.16,78.2 92.16,77.85 R11X23.3 92.8,78.49
  pour Bottom (isolate 0.305): 50.38,91.06 99.15,91.06 99.15,63.88 50.38,63.88
INPUT-AX11  (via drill 0.6 pad 0.9)
  Top 0.254: J1X11.4 3.68,27.56 v4.83,27.56 | X2X11.1 23.44,24.77 | D2X11.1 30.16,27.89 | 30.16,27.89 D3X11.2 | 30.16,27.89 29.65,27.89 v28.96,27.94
  Top 0.305: X1X11.S2 24.38,25.02 23.5,25.02 23.24,24.76 X2X11.1
  Bottom 0.254: v4.83,27.56 10.03,27.56 12.19,25.4 24.77,25.4 X1X11.S2 27.69,27.94 v28.96,27.94
INPUT-AX12  (via drill 0.6 pad 0.9)
  Top 0.254: J1X12.4 3.68,55.5 v4.83,55.5 | X2X12.1 23.44,52.7 | D2X12.1 30.16,55.83 | 30.16,55.83 D3X12.2 | 30.16,55.83 29.65,55.83 v28.96,55.88
  Top 0.305: X1X12.S2 24.38,52.96 23.5,52.96 23.24,52.7 X2X12.1
  Bottom 0.254: v4.83,55.5 10.03,55.5 12.19,53.34 24.77,53.34 X1X12.S2 27.69,55.88 v28.96,55.88
INPUT-AX13  (via drill 0.6 pad 0.9)
  Top 0.254: J1X13.4 3.68,83.44 v4.83,83.44 | X2X13.1 23.44,80.64 | D2X13.1 30.16,83.77 | 30.16,83.77 D3X13.2 | 30.16,83.77 29.65,83.77 v28.96,83.82
  Top 0.305: X1X13.S2 24.38,80.9 23.5,80.9 23.24,80.64 X2X13.1
  Bottom 0.254: v4.83,83.44 10.03,83.44 12.19,81.28 24.77,81.28 X1X13.S2 27.69,83.82 v28.96,83.82
INPUT-AX21  (via drill 0.6 pad 0.9)
  Top 0.254: J1X21.4 53.68,27.56 v54.83,27.56 | X2X21.1 73.44,24.77 | D2X21.1 80.17,27.89 | 80.17,27.89 D3X21.2 | 80.17,27.89 79.65,27.89 v78.96,27.94
  Top 0.305: X1X21.S2 74.38,25.02 73.5,25.02 73.24,24.76 X2X21.1
  Bottom 0.254: v54.83,27.56 60.03,27.56 62.19,25.4 74.77,25.4 X1X21.S2 77.69,27.94 v78.96,27.94
INPUT-AX22  (via drill 0.6 pad 0.9)
  Top 0.254: J1X22.4 53.68,55.5 v54.83,55.5 | X2X22.1 73.44,52.7 | D2X22.1 80.17,55.83 | 80.17,55.83 D3X22.2 | 80.17,55.83 79.65,55.83 v78.96,55.88
  Top 0.305: X1X22.S2 74.38,52.96 73.5,52.96 73.24,52.7 X2X22.1
  Bottom 0.254: v54.83,55.5 60.03,55.5 62.19,53.34 74.77,53.34 X1X22.S2 77.69,55.88 v78.96,55.88
INPUT-AX23  (via drill 0.6 pad 0.9)
  Top 0.254: J1X23.4 53.68,83.44 v54.83,83.44 | X2X23.1 73.44,80.64 | D2X23.1 80.17,83.77 | 80.17,83.77 D3X23.2 | 80.17,83.77 79.65,83.77 v78.96,83.82
  Top 0.305: X1X23.S2 74.38,80.9 73.5,80.9 73.24,80.64 X2X23.1
  Bottom 0.254: v54.83,83.44 60.03,83.44 62.19,81.28 74.77,81.28 X1X23.S2 77.69,83.82 v78.96,83.82
INPUT-BX11  (via drill 0.6 pad 0.9)
  Top 0.254: X1X11.S1 13.34,28.57 10.16,31.11 5.21,31.11 J1X11.5 | v22.86,30.48 22.86,28.7 23.3,28.32 X2X11.3 | D3X11.1 D2X11.2 32.64,29.57 33.15,30.1 v33.15,30.48
  Bottom 0.254: X1X11.S1 18.92,26.67 v22.86,30.48 v33.15,30.48
INPUT-BX12  (via drill 0.6 pad 0.9)
  Top 0.254: X1X12.S1 13.34,56.52 10.16,59.05 5.21,59.05 J1X12.5 | v22.86,58.42 22.86,56.64 23.3,56.26 X2X12.3 | D3X12.1 D2X12.2 32.64,57.51 33.15,58.04 v33.15,58.42
  Bottom 0.254: X1X12.S1 18.92,54.61 v22.86,58.42 v33.15,58.42
INPUT-BX13  (via drill 0.6 pad 0.9)
  Top 0.254: X1X13.S1 13.34,84.45 10.16,87 5.21,87 J1X13.5 | v22.86,86.36 22.86,84.58 23.3,84.2 X2X13.3 | D3X13.1 D2X13.2 32.64,85.45 33.15,85.98 v33.15,86.36
  Bottom 0.254: X1X13.S1 18.92,82.55 v22.86,86.36 v33.15,86.36
INPUT-BX21  (via drill 0.6 pad 0.9)
  Top 0.254: X1X21.S1 63.34,28.57 60.16,31.11 55.21,31.11 J1X21.5 | v72.86,30.48 72.86,28.7 73.3,28.32 X2X21.3 | D3X21.1 D2X21.2 82.64,29.57 83.15,30.1 v83.15,30.48
  Bottom 0.254: X1X21.S1 68.92,26.67 v72.86,30.48 v83.15,30.48
INPUT-BX22  (via drill 0.6 pad 0.9)
  Top 0.254: X1X22.S1 63.34,56.52 60.16,59.05 55.21,59.05 J1X22.5 | v72.86,58.42 72.86,56.64 73.3,56.26 X2X22.3 | D3X22.1 D2X22.2 82.64,57.51 83.15,58.04 v83.15,58.42
  Bottom 0.254: X1X22.S1 68.92,54.61 v72.86,58.42 v83.15,58.42
INPUT-BX23  (via drill 0.6 pad 0.9)
  Top 0.254: X1X23.S1 63.34,84.45 60.16,87 55.21,87 J1X23.5 | v72.86,86.36 72.86,84.58 73.3,84.2 X2X23.3 | D3X23.1 D2X23.2 82.64,85.45 83.15,85.98 v83.15,86.36
  Bottom 0.254: X1X23.S1 68.92,82.55 v72.86,86.36 v83.15,86.36
INPUT-NEGATIVEX11
  Top 0.203: 26.04,20.32 26.04,18.29 27.04,17.39 27.04,16.76 R4X11.2 | D2X11.3 31.11,26.04 30.86,25.78 29.84,25.78 29.46,25.4 29.46,20.87 29.59,20.74
  Top 0.254: 26.04,20.32 26.46,20.74 29.59,20.74 D4X11.1
INPUT-NEGATIVEX12
  Top 0.203: 26.04,48.26 26.04,46.23 27.04,45.33 27.04,44.7 R4X12.2 | D2X12.3 31.11,53.98 30.86,53.72 29.84,53.72 29.46,53.34 29.46,48.81 29.59,48.68
  Top 0.254: 26.04,48.26 26.46,48.68 29.59,48.68 D4X12.1
INPUT-NEGATIVEX13
  Top 0.203: 26.04,76.2 26.04,74.17 27.04,73.27 27.04,72.64 R4X13.2 | D2X13.3 31.11,81.92 30.86,81.66 29.84,81.66 29.46,81.28 29.46,76.75 29.59,76.62
  Top 0.254: 26.04,76.2 26.46,76.62 29.59,76.62 D4X13.1
INPUT-NEGATIVEX21
  Top 0.203: 76.03,20.32 76.03,18.29 77.04,17.39 77.04,16.76 R4X21.2 | D2X21.3 81.11,26.04 80.86,25.78 79.84,25.78 79.46,25.4 79.46,20.87 79.59,20.74
  Top 0.254: 76.03,20.32 76.46,20.74 79.59,20.74 D4X21.1
INPUT-NEGATIVEX22
  Top 0.203: 76.03,48.26 76.03,46.23 77.04,45.33 77.04,44.7 R4X22.2 | D2X22.3 81.11,53.98 80.86,53.72 79.84,53.72 79.46,53.34 79.46,48.81 79.59,48.68
  Top 0.254: 76.03,48.26 76.46,48.68 79.59,48.68 D4X22.1
INPUT-NEGATIVEX23
  Top 0.203: 76.03,76.2 76.03,74.17 77.04,73.27 77.04,72.64 R4X23.2 | D2X23.3 81.11,81.92 80.86,81.66 79.84,81.66 79.46,81.28 79.46,76.75 79.59,76.62
  Top 0.254: 76.03,76.2 76.46,76.62 79.59,76.62 D4X23.1
N$11X11
  Top 0.254: LED1X11.A 45.23,15.99 R10X11.1
N$11X12
  Top 0.254: LED1X12.A 45.23,43.93 R10X12.1
N$11X13
  Top 0.254: LED1X13.A 45.23,71.87 R10X13.1
N$11X21
  Top 0.254: LED1X21.A 95.23,15.99 R10X21.1
N$11X22
  Top 0.254: LED1X22.A 95.23,43.93 R10X22.1
N$11X23
  Top 0.254: LED1X23.A 95.23,71.87 R10X23.1
OCCUPIEDX11
  Top 0.305: Q1X11.1 16.77,14.74 C1X11.1 R1X11.1 R2X11.1
OCCUPIEDX12
  Top 0.305: Q1X12.1 16.77,42.68 C1X12.1 R1X12.1 R2X12.1
OCCUPIEDX13
  Top 0.305: Q1X13.1 16.77,70.62 C1X13.1 R1X13.1 R2X13.1
OCCUPIEDX21
  Top 0.305: Q1X21.1 66.78,14.74 C1X21.1 R1X21.1 R2X21.1
OCCUPIEDX22
  Top 0.305: Q1X22.1 66.78,42.68 C1X22.1 R1X22.1 R2X22.1
OCCUPIEDX23
  Top 0.305: Q1X23.1 66.78,70.62 C1X23.1 R1X23.1 R2X23.1
SENS+X11
  Top 0.254: 41.4,24.89 38.37,24.89 R7X11.1
  Top 0.305: R12X11.1 42.58,24.67 R9X11.1
  Top 0.813: R12X11.1 42.75,25.61 R11X11.1 41.4,24.89
SENS+X12
  Top 0.254: 41.4,52.83 38.37,52.83 R7X12.1
  Top 0.305: R12X12.1 42.58,52.61 R9X12.1
  Top 0.813: R12X12.1 42.75,53.55 R11X12.1 41.4,52.83
SENS+X13
  Top 0.254: 41.4,80.77 38.37,80.77 R7X13.1
  Top 0.305: R12X13.1 42.58,80.55 R9X13.1
  Top 0.813: R12X13.1 42.75,81.49 R11X13.1 41.4,80.77
SENS+X21
  Top 0.254: 91.4,24.89 88.36,24.89 R7X21.1
  Top 0.305: R12X21.1 92.58,24.67 R9X21.1
  Top 0.813: R12X21.1 92.75,25.61 R11X21.1 91.4,24.89
SENS+X22
  Top 0.254: 91.4,52.83 88.36,52.83 R7X22.1
  Top 0.305: R12X22.1 92.58,52.61 R9X22.1
  Top 0.813: R12X22.1 92.75,53.55 R11X22.1 91.4,52.83
SENS+X23
  Top 0.254: 91.4,80.77 88.36,80.77 R7X23.1
  Top 0.305: R12X23.1 92.58,80.55 R9X23.1
  Top 0.813: R12X23.1 92.75,81.49 R11X23.1 91.4,80.77
SENSITIVITYX11  (via drill 0.6 pad 0.9)
  Top 0.254: IC1X11.5 v34.29,13.59 | R8X11.2 34.02,18.53 v33.15,19.43 v33.15,23.5
  Top 0.305: R12X11.3 R9X11.3
  Top 0.406: R12X11.3 R11X11.2
  Bottom 0.254: v34.29,13.59 34.29,18.29 v33.15,19.43
  Bottom 0.305: v33.15,23.5 R11X11.2
SENSITIVITYX12  (via drill 0.6 pad 0.9)
  Top 0.254: IC1X12.5 v34.29,41.53 | R8X12.2 34.02,46.47 v33.15,47.37 v33.15,51.44
  Top 0.305: R12X12.3 R9X12.3
  Top 0.406: R12X12.3 R11X12.2
  Bottom 0.254: v34.29,41.53 34.29,46.23 v33.15,47.37
  Bottom 0.305: v33.15,51.44 R11X12.2
SENSITIVITYX13  (via drill 0.6 pad 0.9)
  Top 0.254: IC1X13.5 v34.29,69.47 | R8X13.2 34.02,74.41 v33.15,75.31 v33.15,79.38
  Top 0.305: R12X13.3 R9X13.3
  Top 0.406: R12X13.3 R11X13.2
  Bottom 0.254: v34.29,69.47 34.29,74.17 v33.15,75.31
  Bottom 0.305: v33.15,79.38 R11X13.2
SENSITIVITYX21  (via drill 0.6 pad 0.9)
  Top 0.254: IC1X21.5 v84.29,13.59 | R8X21.2 84.03,18.53 v83.15,19.43 v83.15,23.5
  Top 0.305: R12X21.3 R9X21.3
  Top 0.406: R12X21.3 R11X21.2
  Bottom 0.254: v84.29,13.59 84.29,18.29 v83.15,19.43
  Bottom 0.305: v83.15,23.5 R11X21.2
SENSITIVITYX22  (via drill 0.6 pad 0.9)
  Top 0.254: IC1X22.5 v84.29,41.53 | R8X22.2 84.03,46.47 v83.15,47.37 v83.15,51.44
  Top 0.305: R12X22.3 R9X22.3
  Top 0.406: R12X22.3 R11X22.2
  Bottom 0.254: v84.29,41.53 84.29,46.23 v83.15,47.37
  Bottom 0.305: v83.15,51.44 R11X22.2
SENSITIVITYX23  (via drill 0.6 pad 0.9)
  Top 0.254: IC1X23.5 v84.29,69.47 | R8X23.2 84.03,74.41 v83.15,75.31 v83.15,79.38
  Top 0.305: R12X23.3 R9X23.3
  Top 0.406: R12X23.3 R11X23.2
  Bottom 0.254: v84.29,69.47 84.29,74.17 v83.15,75.31
  Bottom 0.305: v83.15,79.38 R11X23.2
STAGE1+X11
  Top 0.254: R6X11.2 C3X11.1 30.21,16.01 30.73,15.49 35.31,15.49 35.56,15.75 IC1X11.3 | R6X11.2 30.21,18.79 31.11,19.68 D4X11.3 D3X11.3 | R6X11.2 R3X11.1
STAGE1+X12
  Top 0.254: R6X12.2 C3X12.1 30.21,43.95 30.73,43.43 35.31,43.43 35.56,43.69 IC1X12.3 | R6X12.2 30.21,46.73 31.11,47.62 D4X12.3 D3X12.3 | R6X12.2 R3X12.1
STAGE1+X13
  Top 0.254: R6X13.2 C3X13.1 30.21,71.89 30.73,71.37 35.31,71.37 35.56,71.63 IC1X13.3 | R6X13.2 30.21,74.67 31.11,75.56 D4X13.3 D3X13.3 | R6X13.2 R3X13.1
STAGE1+X21
  Top 0.254: R6X21.2 C3X21.1 80.22,16.51 80.22,16.01 80.73,15.49 85.31,15.49 85.56,15.75 IC1X21.3 | R6X21.2 80.22,18.79 81.11,19.68 D4X21.3 D3X21.3 | R6X21.2 R3X21.1
STAGE1+X22
  Top 0.254: R6X22.2 C3X22.1 80.22,43.95 80.73,43.43 85.31,43.43 85.56,43.69 IC1X22.3 | R6X22.2 80.22,46.73 81.11,47.62 D4X22.3 D3X22.3 | R6X22.2 R3X22.1
STAGE1+X23
  Top 0.254: R6X23.2 C3X23.1 80.22,71.89 80.73,71.37 85.31,71.37 85.56,71.63 IC1X23.3 | R6X23.2 80.22,74.67 81.11,75.56 D4X23.3 D3X23.3 | R6X23.2 R3X23.1
STAGE1-X11
  Top 0.203: R5X11.2 25.14,15.88 | 25.14,15.88 R4X11.1 | 25.15,15.88 25.14,15.88
  Top 0.254: IC1X11.2 36.83,15.37 36.45,14.99 28.57,14.99 27.56,15.88 25.15,15.88 | R5X11.2 25.4,15.12
  Top 0.305: C2X11.1 R5X11.2
STAGE1-X12
  Top 0.203: R5X12.2 25.14,43.81 | 25.14,43.81 R4X12.1 | 25.15,43.81 25.14,43.81
  Top 0.254: IC1X12.2 36.83,43.31 36.45,42.93 28.57,42.93 27.56,43.81 25.15,43.81 | R5X12.2 25.4,43.06
  Top 0.305: C2X12.1 R5X12.2
STAGE1-X13
  Top 0.203: R5X13.2 25.14,71.75 | 25.14,71.75 R4X13.1 | 25.15,71.75 25.14,71.75
  Top 0.254: IC1X13.2 36.83,71.25 36.45,70.87 28.57,70.87 27.56,71.75 25.15,71.75 | R5X13.2 25.4,71
  Top 0.305: C2X13.1 R5X13.2
STAGE1-X21
  Top 0.203: R5X21.2 75.14,15.88 | 75.14,15.88 R4X21.1 | 75.15,15.88 75.14,15.88
  Top 0.254: IC1X21.2 86.83,15.37 86.45,14.99 78.58,14.99 77.56,15.88 75.15,15.88 | R5X21.2 75.4,15.12
  Top 0.305: C2X21.1 R5X21.2
STAGE1-X22
  Top 0.203: R5X22.2 75.14,43.81 | 75.14,43.81 R4X22.1 | 75.15,43.81 75.14,43.81
  Top 0.254: IC1X22.2 86.83,43.31 86.45,42.93 78.58,42.93 77.56,43.81 75.15,43.81 | R5X22.2 75.4,43.06
  Top 0.305: C2X22.1 R5X22.2
STAGE1-X23
  Top 0.203: R5X23.2 75.14,71.75 | 75.14,71.75 R4X23.1 | 75.15,71.75 75.14,71.75
  Top 0.254: IC1X23.2 86.83,71.25 86.45,70.87 78.58,70.87 77.56,71.75 75.15,71.75 | R5X23.2 75.4,71
  Top 0.305: C2X23.1 R5X23.2
TRIGGEREDX11
  Top 0.254: IC1X11.1 38.1,15.11 37.47,14.48 35.69,14.48 | IC1X11.6 35.69,11.23 35.69,14.48 | 35.69,14.48 26.93,14.48
  Top 0.305: C2X11.2 26.93,14.48 R5X11.1
TRIGGEREDX12
  Top 0.254: IC1X12.1 38.1,43.05 37.47,42.42 35.69,42.42 | IC1X12.6 35.69,39.17 35.69,42.42 | 35.69,42.42 26.93,42.42
  Top 0.305: C2X12.2 26.93,42.42 R5X12.1
TRIGGEREDX13
  Top 0.254: IC1X13.1 38.1,70.99 37.47,70.36 35.69,70.36 | IC1X13.6 35.69,67.11 35.69,70.36 | 35.69,70.36 26.93,70.36
  Top 0.305: C2X13.2 26.93,70.36 R5X13.1
TRIGGEREDX21
  Top 0.254: IC1X21.1 88.1,15.11 87.47,14.48 85.69,14.48 | IC1X21.6 85.69,11.23 85.69,14.48 | 85.69,14.48 76.94,14.48
  Top 0.305: C2X21.2 76.94,14.48 R5X21.1
TRIGGEREDX22
  Top 0.254: IC1X22.1 88.1,43.05 87.47,42.42 85.69,42.42 | IC1X22.6 85.69,39.17 85.69,42.42 | 85.69,42.42 76.94,42.42
  Top 0.305: C2X22.2 76.94,42.42 R5X22.1
TRIGGEREDX23
  Top 0.254: IC1X23.1 88.1,70.99 87.47,70.36 85.69,70.36 | IC1X23.6 85.69,67.11 85.69,70.36 | 85.69,70.36 76.94,70.36
  Top 0.305: C2X23.2 76.94,70.36 R5X23.1
V+X11
  pour Top (isolate 0.305): 0.38,35.18 49.15,35.18 49.15,8 0.38,8
V+X12
  pour Top (isolate 0.305): 0.38,63.12 49.15,63.12 49.15,35.94 0.38,35.94
V+X13
  pour Top (isolate 0.305): 0.38,91.06 49.15,91.06 49.15,63.88 0.38,63.88
V+X21
  pour Top (isolate 0.305): 50.38,35.18 99.15,35.18 99.15,8 50.38,8
V+X22
  pour Top (isolate 0.305): 50.38,63.12 99.15,63.12 99.15,35.94 50.38,35.94
V+X23
  pour Top (isolate 0.305): 50.38,91.06 99.15,91.06 99.15,63.88 50.38,63.88

## Text on the board
tPlace: MRCS | cpOD | Engineering Test Sample 2 | v2.0 | FID-UL | !OCC | !OCC | 1 | Sensitivity | 1 | Sensitivity | TRACK | KL3 | TRACK | KL3 | V+ | KL2 | V+ | KL2 | !OCC | !OCC | TRACK | 3 | KL3 | TRACK | 3 | KL3 | + | + | G | GND | G | GND | Detected | Detected | 72p | 72p | KL2 | KL2 | MRCS | MRCS | 2021-10 | LM358D | 2021-10 | LM358D | Test Sample 2 | cpOD | v2.0 | Test Sample 2 | cpOD | v2.0 | !OCC | !OCC | 1 | Sensitivity | 1 | Sensitivity | TRACK | KL3 | TRACK | KL3 | V+ | KL2 | V+ | KL2 | !OCC | !OCC | TRACK | 3 | KL3 | TRACK | 3 | KL3 | + | + | G | GND | G | GND | Detected | Detected | 72p | 72p | KL2 | KL2 | MRCS | MRCS | 2021-10 | LM358D | 2021-10 | LM358D | Test Sample 2 | cpOD | v2.0 | Test Sample 2 | cpOD | v2.0 | !OCC | !OCC | 1 | Sensitivity | 1 | Sensitivity | TRACK | KL3 | TRACK | KL3 | V+ | KL2 | V+ | KL2 | !OCC | !OCC | TRACK | 3 | KL3 | TRACK | 3 | KL3 | + | + | G | GND | G | GND | Detected | Detected | 72p | 72p | KL2 | KL2 | MRCS | MRCS | 2021-10 | LM358D | 2021-10 | LM358D | Test Sample 2 | cpOD | v2.0 | Test Sample 2 | cpOD | v2.0 | FID-LR | Job# | JLCJLCJLC | John Plocher / 2021.10
bPlace: !OCC | !OCC | TRACK | TRACK | -B | -B | Model Railroading is Fun! | Model Railroading is Fun! | V+ | V+ | -A | -A | 5-12vDC | Inspired by | 5-12vDC | Inspired by | TRACK | Dr Bruce Chubb | TRACK | Dr Bruce Chubb | !OCC | !OCC | V+ | and MRCS | MFS | V+ | and MRCS | MFS | J2 | GND | J2 | GND | GND | GND | cpOD | cpOD | DCC Feed | DCC Feed | John Plocher | John Plocher | SPCoast.com | SPCoast.com | Transformer-based / DCC Occupancy Detector | Transformer-based / DCC Occupancy Detector | Made in the PCR, Coast Division, NMRA | Made in the PCR, Coast Division, NMRA | !OCC | !OCC | TRACK | TRACK | -B | -B | Model Railroading is Fun! | Model Railroading is Fun! | V+ | V+ | -A | -A | 5-12vDC | Inspired by | 5-12vDC | Inspired by | TRACK | Dr Bruce Chubb | TRACK | Dr Bruce Chubb | !OCC | !OCC | V+ | and MRCS | MFS | V+ | and MRCS | MFS | J2 | GND | J2 | GND | GND | GND | cpOD | cpOD | DCC Feed | DCC Feed | John Plocher | John Plocher | SPCoast.com | SPCoast.com | Transformer-based / DCC Occupancy Detector | Transformer-based / DCC Occupancy Detector | Made in the PCR, Coast Division, NMRA | Made in the PCR, Coast Division, NMRA | !OCC | !OCC | TRACK | TRACK | -B | -B | Model Railroading is Fun! | Model Railroading is Fun! | V+ | V+ | -A | -A | 5-12vDC | Inspired by | 5-12vDC | Inspired by | TRACK | Dr Bruce Chubb | TRACK | Dr Bruce Chubb | !OCC | !OCC | V+ | and MRCS | MFS | V+ | and MRCS | MFS | J2 | GND | J2 | GND | GND | GND | cpOD | cpOD | DCC Feed | DCC Feed | John Plocher | John Plocher | SPCoast.com | Transformer-based / DCC Occupancy Detector | SPCoast.com | Transformer-based / DCC Occupancy Detector | Made in the PCR, Coast Division, NMRA | Made in the PCR, Coast Division, NMRA
_tNames: D2 | D2 | FID1 | FID1 | R7 | R7 | D3 | D3 | D4 | D4 | R9 | R9 | R3 | R6 | R8 | R3 | R6 | R8 | C3 | C3 | J2 | C1 | R1 | R4 | J2 | C1 | R1 | R4 | J1 | R2 | R5 | R10 | J1 | R2 | R5 | R10 | IC1 | LED1 | IC1 | LED1 | C2 | C2 | Q1 | C4 | Q1 | C4 | FID2 | FID2 | D1 | D1 | D2 | D2 | FID1 | FID1 | R7 | R7 | D3 | D3 | D4 | D4 | R9 | R9 | R3 | R6 | R8 | R3 | R6 | R8 | R4 | C3 | R4 | C3 | J2 | C1 | R1 | J2 | C1 | R1 | J1 | R2 | R5 | R10 | J1 | R2 | R5 | R10 | IC1 | LED1 | IC1 | LED1 | C2 | C2 | Q1 | C4 | Q1 | C4 | FID2 | FID2 | D1 | D1 | D2 | D2 | FID1 | FID1 | R7 | R7 | D3 | D3 | D4 | D4 | R3 | R6 | R9 | R3 | R6 | R9 | R8 | R8 | J2 | C1 | R1 | R4 | C3 | J2 | C1 | R1 | R4 | C3 | J1 | R2 | R5 | R10 | J1 | R2 | R5 | R10 | IC1 | LED1 | IC1 | LED1 | C2 | C2 | Q1 | C4 | Q1 | C4 | FID2 | FID2 | D1 | D1